# Altium PCB USBBridge3150.PcbDoc
Units mm, origin at the board's own origin, x right, y up, seen from the top; angles counter-clockwise.
Board outline 9.14 x 20.32 mm, 2 copper layers (Top Layer, Bottom Layer), stack 0.671 mm thick; 3 components, 5 nets, 39 pads, 0 vias.
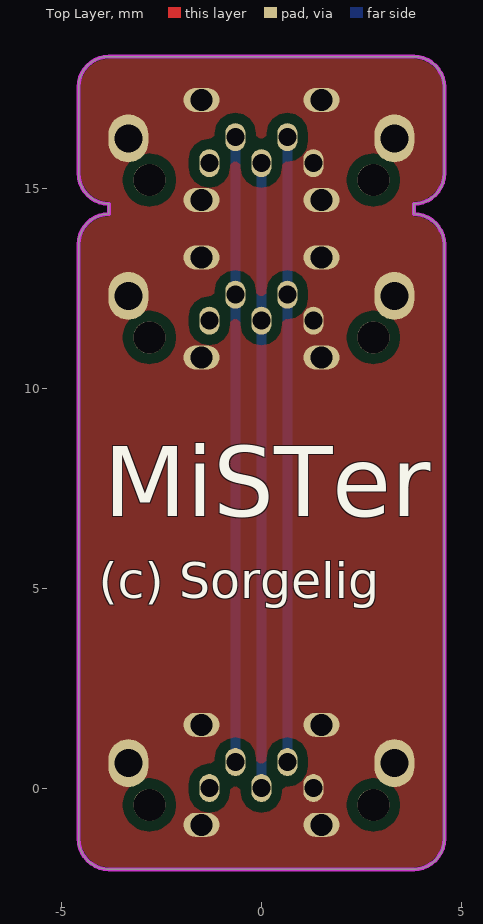
[diagram p0: Top Layer view]
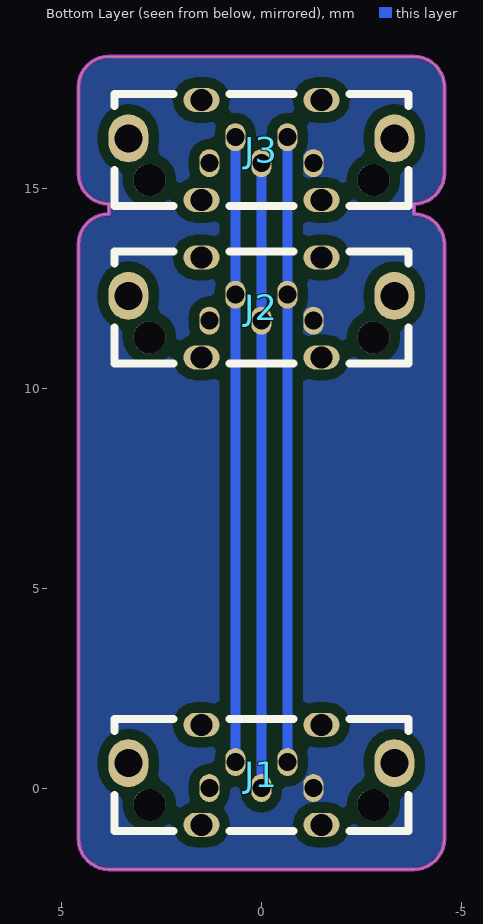
[diagram p1: Bottom Layer view, seen from below]
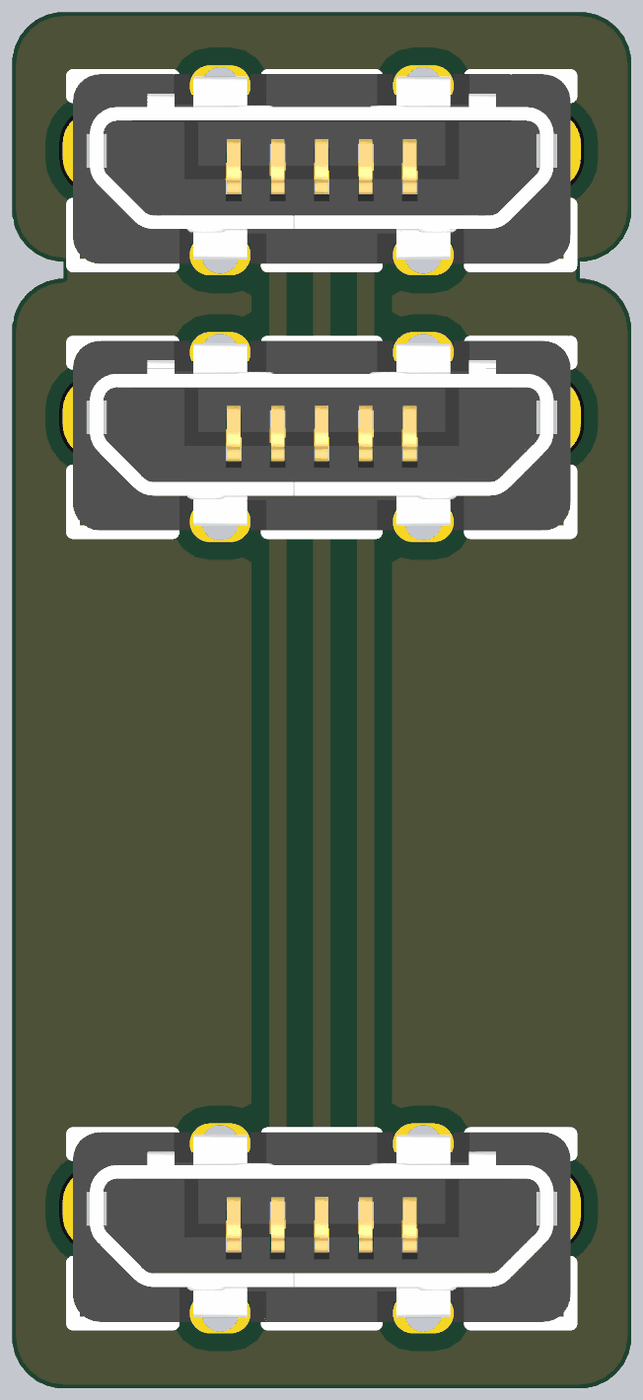
[diagram p2: 3D render of the assembled board from below, using the file's embedded part models]

## Layer stack, top to bottom
Top Solder: solder mask 0.0102, Solder Resist, Dk 3.5
Top Layer: signal copper 0.0356
Dielectric 1: dielectric 0.6, FR-4, Dk 4.8
Bottom Layer: signal copper 0.0356
Bottom Solder: solder mask 0.0102, Solder Resist, Dk 3.5

## Board outline
-3.81,-2.032 cw(c-3.81,-1.27) -4.572,-1.27 -4.572,13.589 cw(c-3.81,13.589) -3.81,14.351 -3.81,14.605 cw(c-3.81,15.367) -4.572,15.367 -4.572,17.526 cw(c-3.81,17.526) -3.81,18.288 3.81,18.288 cw(c3.81,17.526) 4.572,17.526 4.572,15.367 cw(c3.81,15.367) 3.81,14.605 3.81,14.351 cw(c3.81,13.589) 4.572,13.589 4.572,-1.27 cw(c3.81,-1.27) 3.81,-2.032

## Design rules (kind name [scope] priority, off if disabled: settings)
BoardOutlineClearance [All] p1: gap=0 ignorepadtopadclearanceinfootprint=FALSE
Clearance keep-out_clearance [InNamedPolygon('ground') or InNamedPolygon('power') vs OnLayer('Keep-Out Layer')] p1: gap=0 ignorepadtopadclearanceinfootprint=FALSE
Clearance [All] p2: gap=0.254 ignorepadtopadclearanceinfootprint=TRUE except(0: Arc-Hole Track-Hole SMDPad-Hole THPad-Hole Via-Hole Fill-Hole Poly-Hole Region-Hole Text-Hole)
ComponentClearance [All] p1 off: gap=0.254 collisioncheckmode=3 verticalgap=0.254 showdistances=FALSE
Height [All] p1 off: minheight=0 maxheight=25.4 prefheight=12.7
HoleSize [All] p1: absolutevalues=TRUE maxlimit=6 minlimit=0.025 maxpercent=80.000 minpercent=20.000
MinimumSolderMaskSliver [All] p1: minsoldermaskwidth=0.25
PolygonConnect [All] p1: connectstyle=Direct reliefconductorwidth=0.5 reliefentries=4 polygonreliefangle="90 Angle" airgapwidth=0.254
RoutingVias [All] p1: holewidth=0.4 width=1 viastyle="Through Hole" minholewidth=0.4 minwidth=1 maxholewidth=0.4 maxwidth=1
SilkToSolderMaskClearance [IsPad] p1 off: minsilkscreentomaskgap=0.127 clearancetoexposedcopper=TRUE
SolderMaskExpansion SolderMaskExpansion_U1 [InComponent('U1')] p1: expansion=0
SolderMaskExpansion [All] p2: expansion=0.051
Width Width_power [InNetClass('power')] p1: maxlimit=2 minlimit=0.254 preferedwidth=0.508 minimp=50.000000 maximp=50.000000 favimp=50.000000
Width Width_signal [All] p2: maxlimit=0.254 minlimit=0.254 preferedwidth=0.254
25 further rules are at their usual default settings.

## Components (designator, comment, footprint, x,y, rotation, side; value= is the part's Value field where it differs from the comment)
J1 "USB3150" USB3150 0,0.325 r0 bottom locked
J2 "USB3150" USB3150 0,12.009 r0 bottom locked
J3 "USB3150" USB3150 0,15.946 r0 bottom locked

## Footprints (in the part's own frame and the unit in brackets; to place one, negate y for a bottom-side part, rotate by r counter-clockwise, add the part's x,y. Pads: shape width x height; smd on the part's side, far side on the other; paste and mask are expansions set on the pad)
USB3150 [mm] "Micro USB Plug, Type B, Through-Hole, Vertical,  with Shell Stakes, with Locating Pegs"
  oval 0.5x0.7 hole 0.45 mask+0: 1(-1.3,0.325) 2(-0.65,-0.325) 3(0,0.325) 4(0.65,-0.325) 5(1.3,0.325)
  oval 1x1.2 hole 0.7: 5(-3.325,-0.295) 5(3.325,-0.295)
  oval 0.9x0.6 hole 0.55 mask+0: 5(-1.5,-1.255) 5(-1.5,1.245) 5(1.5,-1.255) 5(1.5,1.245)
  round 0.8 hole 0.8 unplated: ""(-2.8,0.745) ""(2.8,0.745)
  silkscreen extent -3.67,-1.4 3.67,1.4, body extent -3.68,-1.43 3.67,1.37, height 7.15

## Part data
J1 J2 J3: library part USB3150-XX-XXX-X_revA, "Micro USB Plug, Type B, Through-Hole, Vertical,  with Shell Stakes, with Locating Pegs"

## Nets (pads, with @x,y where several pads share a name; then routed paths per layer and width w, separated by ;. In a path a pad name is that pad's centre, name@x,y a point inside that pad or via, vN(x,y) a via of type N, cw(c..) or ccw(c..) an arc to the next point about the centre after c; other vN are vias at no path point)
GND: J1.5 J2.5 J3.5
NetJ1_2: J1.2 J2.2 J3.2 | length 15.6
  Bottom Layer w0.254: J1.2 J2.2 J3.2
NetJ1_3: J1.3 J2.3 J3.3 | length 15.6
  Bottom Layer w0.254: J1.3 J2.3 J3.3
NetJ1_4: J1.4 J2.4 J3.4 | length 15.6
  Bottom Layer w0.254: J1.4 J2.4 J3.4
VCC: J1.1 J2.1 J3.1
pads on no net: J1. J2. J3.

## Polygon pours and split planes (outlines as drawn)
GND on Top Layer "ground" (solid, remove dead copper, pour order 29): -4.572,-1.27 -4.572,17.526 cw(c-3.81,17.526) -3.81,18.288 3.81,18.288 cw(c3.81,17.526) 4.572,17.526 4.572,-1.27 cw(c3.81,-1.27) 3.81,-2.032 -3.81,-2.032 cw(c-3.81,-1.27)
VCC on Bottom Layer "power" (solid, remove dead copper, pour order 30): -4.572,-1.27 -4.572,17.526 cw(c-3.81,17.526) -3.81,18.288 3.81,18.288 cw(c3.81,17.526) 4.572,17.526 4.572,-1.27 cw(c3.81,-1.27) 3.81,-2.032 -3.81,-2.032 cw(c-3.81,-1.27)

## Keep-outs
Keep-Out Layer:
  the board outline again, w0.1

## Silkscreen, mask and mechanical layers (free items; w line width, h text height)
Top Overlay:
  text "MiSTer" at -3.937,6.223 h3
  text "(c) Sorgelig" at -4.064,4.445 h1.52